# Altium PCB 千米手柄参数.PcbDoc
Units mil, origin at the board's own origin, x right, y up, seen from the top; angles counter-clockwise.
Board outline 1270.82 x 2484.15 mil, 2 copper layers (Top Layer, Bottom Layer); 28 components, 29 nets, 126 pads, 18 vias.
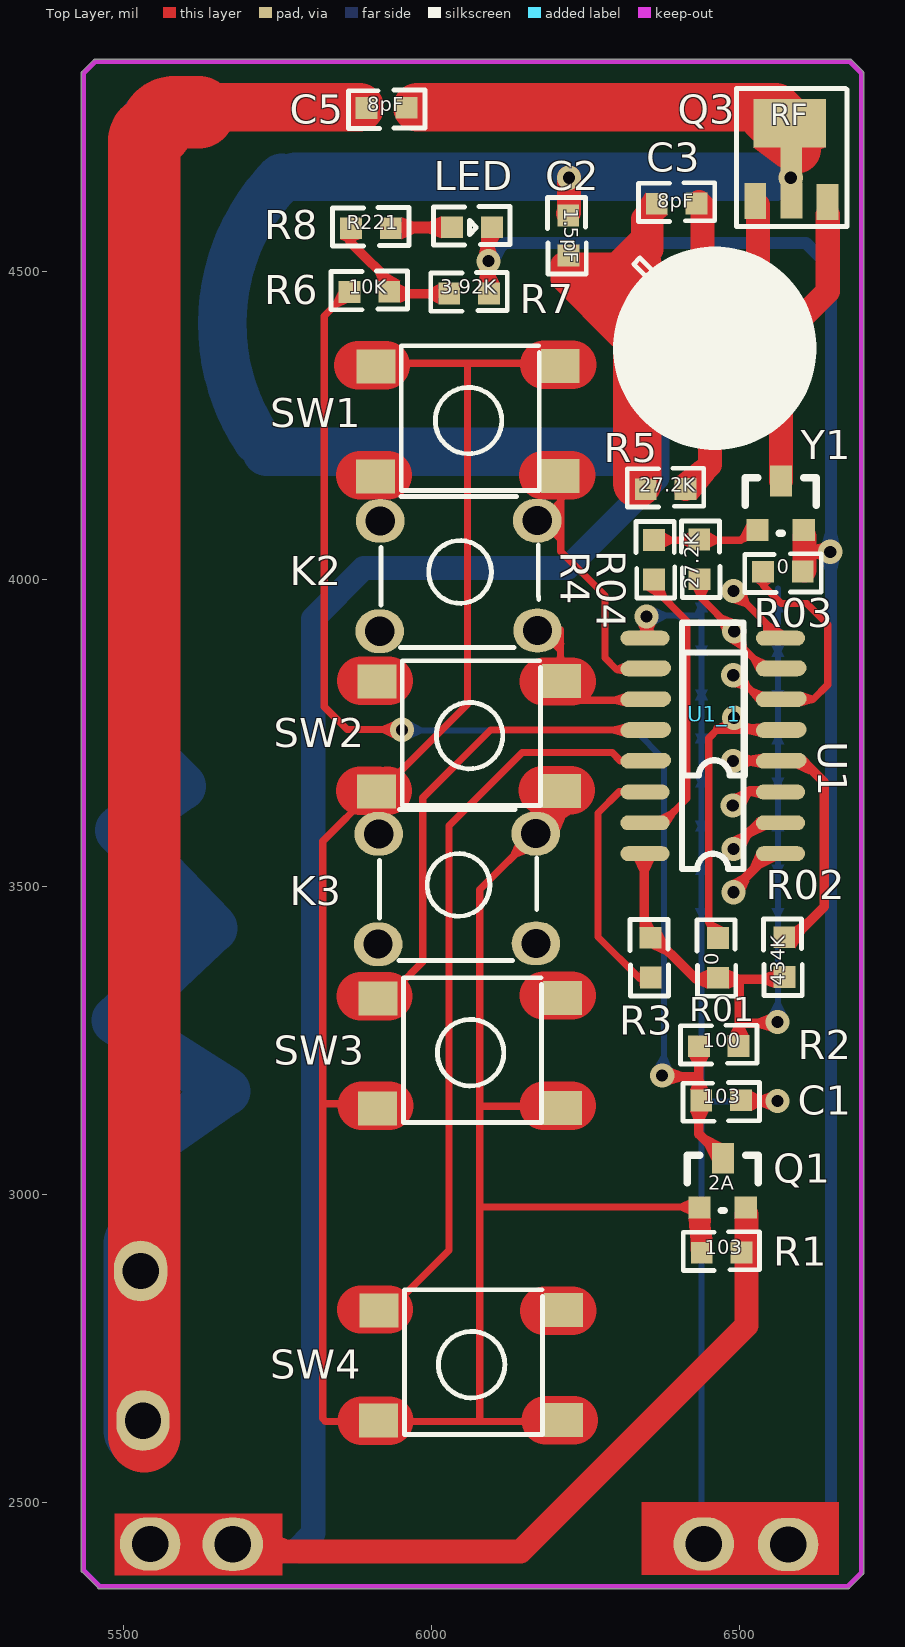
[diagram p0: Top Layer view]
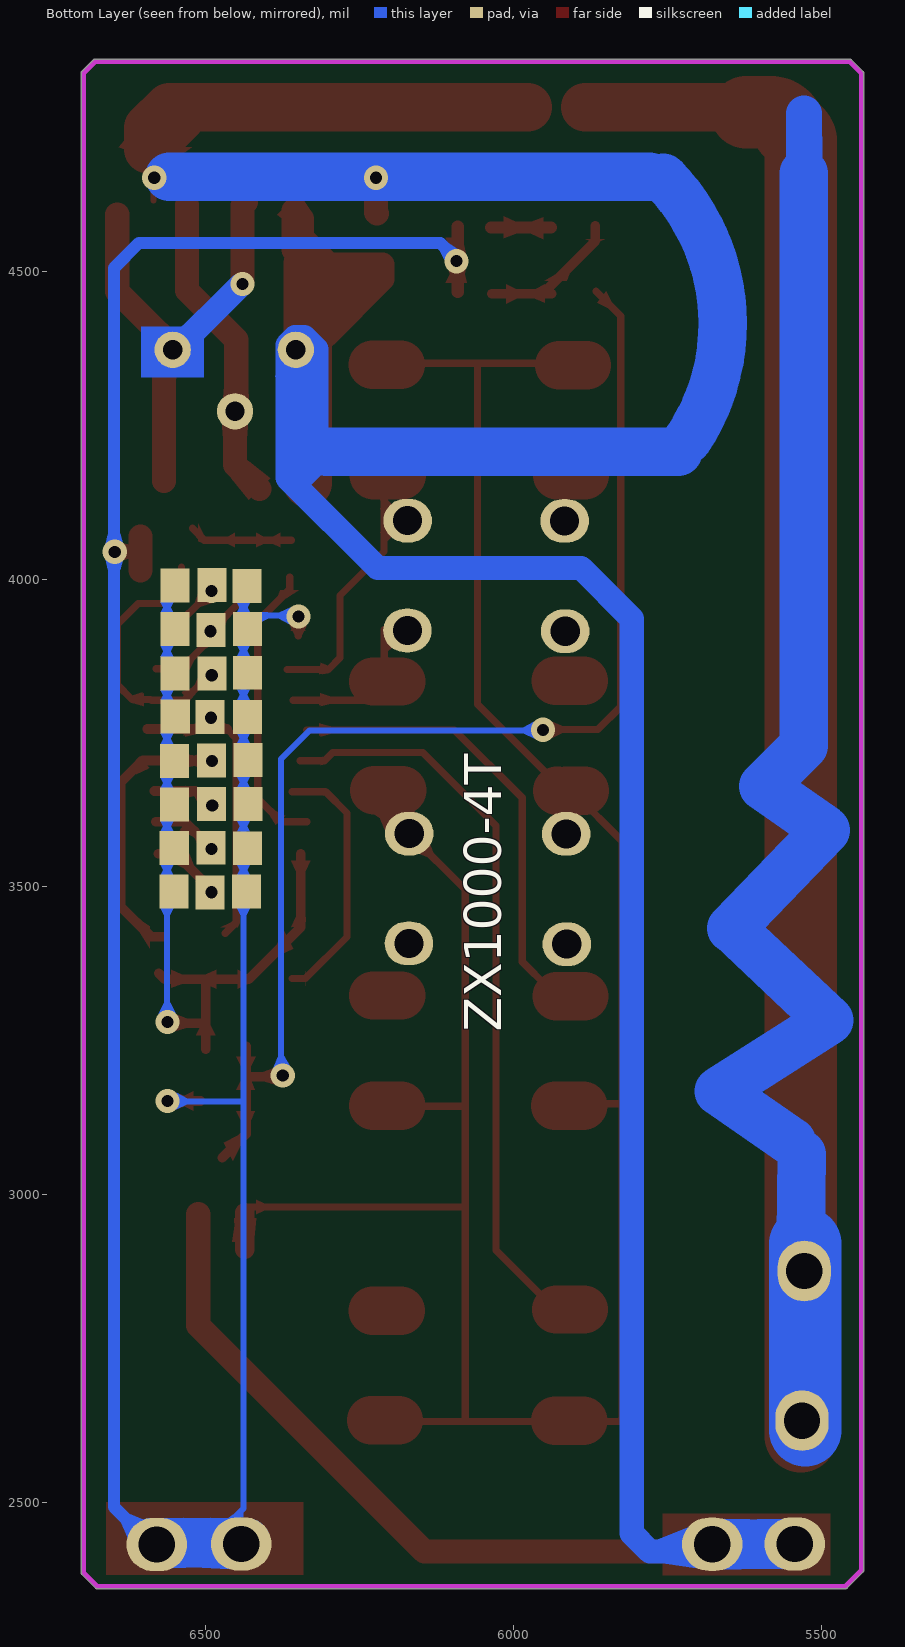
[diagram p1: Bottom Layer view, seen from below]

## Layer stack, top to bottom
Top Solder: solder mask 0.4, Solder Resist, Dk 3.5
Top Layer: signal copper 1.4
Dielectric 1: dielectric 12.6, FR-4, Dk 4.8
Bottom Layer: signal copper 1.4
Bottom Solder: solder mask 0.4, Solder Resist, Dk 3.5

## Board outline
5432.21,2387.21 5458.04,2361.37 ccw(c5460.83,2364.17) 5460.83,2360.22 6675.83,2360.22 ccw(c6675.83,2364.17) 6678.63,2361.37 6700.71,2383.46 ccw(c6697.92,2386.25) 6701.87,2386.25 6701.87,4815 ccw(c6697.92,4815) 6701.78,4815.83 ccw(c6697.92,4816.67) 6701.87,4816.67 6701.87,4822.08 ccw(c6697.92,4822.08) 6700.71,4824.88 6682.38,4843.21 ccw(c6679.58,4840.42) 6679.58,4844.37 5453.75,4844.37 ccw(c5453.75,4840.42) 5450.96,4843.21 5432.21,4824.46 ccw(c5435,4821.67) 5431.05,4821.67 5431.05,2390 ccw(c5435,2390)

## Design rules (kind name [scope] priority, off if disabled: settings)
Clearance [All] p1: gap=10 ignorepadtopadclearanceinfootprint=FALSE except(0: Arc-Hole Track-Hole SMDPad-Hole THPad-Hole Via-Hole Fill-Hole Poly-Hole Region-Hole Text-Hole)
PolygonConnect [All] p1: connectstyle=Relief reliefconductorwidth=10 reliefentries=4 polygonreliefangle="90 Angle" airgapwidth=10
RoutingVias [All] p1: holewidth=28 width=50 viastyle="Through Hole" minholewidth=28 minwidth=50 maxholewidth=28 maxwidth=50
SolderMaskExpansion [All] p1: expansion=4 istentingtop=FALSE
Width [All] p1: maxlimit=200 minlimit=10 preferedwidth=10 minimp=50.000000 maximp=50.000000 favimp=50.000000
30 further rules are at their usual default settings.

## Components (designator, comment, footprint, x,y, rotation, side; value= is the part's Value field where it differs from the comment)
C1 "" R06 6430,3158.33 r90 top
C2 "" R06 6227.08,4598.33 r0 top
C3 "" R06 6438.33,4605 r270 top
C5 "" R06 5886.67,4770.42 r90 top
K2 "" K1 5911.67,4085.83 r270 top
K3 "" K1 5909.17,3577.5 r270 top
LED "" R06 6105.83,4566.67 r270 top
Q1 "" SOT-23 6435.42,2979.58 r0 top
Q3 "" Q2 6587.92,4623.75 r270 top
R1 "" R06 6511.25,2901.25 r270 top
R01 "" R06 6470,3425 r0 top
R2 "" R06 6506.67,3236.67 r270 top
R02 "" R06 6577.92,3426.25 r0 top
R3 "" R06 6360.83,3425.42 r0 top
R03 "" R06 6530.42,4017.08 r90 top
R4 "" R06 6356.25,3991.25 r180 top
R04 "" R06 6430,3991.88 r180 top
R5 "" R06 6420.42,4141.25 r270 top
R6 "" R06 5939.17,4461.67 r270 top
R7 "" R06 6101.25,4459.17 r270 top
R8 "" R06 5941.67,4565 r270 top
SW1 "" sw1 6213.33,4335 r270 top
SW2 "" sw1 6215,3823.33 r270 top
SW3 "" sw1 6216.67,3308.33 r270 top
SW4 "" sw1 6218.33,2801.67 r270 top
U1 "" SO-16 6566.67,3554.17 r180 top
U1_1 "" SO-8 6569.17,3705.83 r180 top
Y1 "" SOT-23 6529.58,4079.58 r0 top

## Footprints (in the part's own frame and the unit in brackets; to place one, negate y for a bottom-side part, rotate by r counter-clockwise, add the part's x,y. Pads: shape width x height; smd on the part's side, far side on the other; paste and mask are expansions set on the pad)
K1 [mm]
  oval 1.8x2 hole 1.2: 21(4.329,0.106) 22(-0.222,0.127) 23(-0.233,6.604) 24(4.297,6.615)
  silkscreen extent -1.23,0.16 5,6.65
Q2 [mm]
  rect 1.5x0.9 smd: 34(0.286,1.408) 35(0.222,-0.085) 36(0.243,-1.577) 37(-1.281,-0.095)
  rect 2x3 smd: 39(-2.963,-0.159)
  silkscreen extent -4.4,-2.36 1.29,2.21
R06 [mm]
  rect 0.9x0.9 smd: 31(-0.127,-0.201) 32(-0.122,-1.841)
  silkscreen extent -0.98,-2.6 0.61,0.55
SO-8 [mil]
  oval 80x24 smd: 1(0,0) 2(0,-50) 3(0,-100) 4(0,-150) 5(220,-150) 6(220,-100) 7(220,-50) 8(220,0)
  silkscreen extent 60,-175 160,25
SO-16 [mil]
  oval 80x24 smd: 1(0,0) 2(0,-50) 3(0,-100) 4(0,-150) 5(0,-200) 6(0,-250) 7(0,-300) 8(0,-350) 9(220,-350) 10(220,-300) 11(220,-250) 12(220,-200) 13(220,-150) 14(220,-100) 15(220,-50) 16(220,0)
  silkscreen extent 60,-375 160,25
SOT-23 [mil]
  rect 36x36 smd: 1(0,0) 2(75,0)
  rect 36x50 smd: 3(38,80)
  silkscreen extent -20,-5 95,85
sw1 [mm]
  rect 1.4x1.6 smd: 26(-0.286,-0.106) 27(4.255,-0.106) 28(-0.265,-7.715) 29(4.276,-7.736)
  silkscreen extent -1.12,-6.67 4.85,-0.97

## Free pads (board coordinates)
  rect 47.24x55.12 smd far side: 1(6489.58,3990.42) 2(6432.5,3988.75) 3(6432.08,3919.17) 4(6490.83,3917.5) 5(6431.67,3847.92) 6(6489.58,3847.08) 7(6432.08,3776.25) 8(6492.5,3776.25) 9(6490.42,3705.42) 10(6431.25,3706.25) 11(6430.83,3634.58) 12(6490.42,3634.58) 13(6491.25,3563.75) 14(6431.67,3562.92) 15(6433.75,3492.5) 16(6492.92,3491.25) 17(6551.25,3492.5) 18(6550.83,3563.33) 19(6550.42,3633.75) 20(6550.42,3704.58) 21(6549.17,3776.67) 22(6549.58,3846.67) 23(6549.58,3918.75) 24(6549.58,3989.58)
  round 59.05 hole 31.5: 25(6353.33,4372.5) 26(6452.08,4272.5) 27(6553.33,4372.5)
  oval 86.61x98.42 hole 59.05: 28(5527.5,2876.25) 29(5531.25,2633.33)
  oval 98.42x86.61 hole 59.05: 30(6579.17,2432.08) 31(6442.08,2432.92) 32(5542.92,2432.92) 33(5677.08,2432.5)

## Via types
v1: diameter 39.37, hole 19.68, Top Layer to Bottom Layer, 18 vias

## Nets (pads, with @x,y where several pads share a name; then routed paths per layer and width w, separated by ;. In a path a pad name is that pad's centre, name@x,y a point inside that pad or via, vN(x,y) a via of type N, cw(c..) or ccw(c..) an arc to the next point about the centre after c; other vN are vias at no path point)
NewNet1: pad.26 Q3.36 R5.31 | length 510.8
  Top Layer w39.37: R5.31 6452.08,4185.83 pad.26 ; pad.26@6450,4272.5 6450,4388.75 6530,4468.75 Q3.36@6530,4607.5
NewNet2: C3.31 pad.27 Q3.34 Y1.3 | length 754.9
  Top Layer w39.37: C3.31@6434.17,4612.5 6440,4606.67 v1@6440,4484.17 ; Y1.3 6567.58,4358.25 pad.27 6553.33,4377.08 6643.33,4467.08 Q3.34@6643.33,4592.08
  Bottom Layer w39.37: v1@6444.17,4476.67 pad.27@6549.17,4371.67
  other v1: 6440,4479.17
NewNet3: C2.31 C2.32 C3.32 C5.32 pad.25 pad.32 pad.33 Q1.2 Q3.37 Q3.39 R1.31 R5.32 | length 7936.5
  Top Layer w39.37: pad.32@5513.33,2420.83 6144.58,2420.83 6511.67,2787.92 Q1.2@6511.67,2968.33 ; C2.31@6221.67,4593.75 6223.33,4595.42 v1(6223.33,4652.01) ; 6253.33,4488.75 6309.58,4488.75 ; 6255.83,4486.25 6306.67,4435.42 ; 6305,4395 6212.5,4487.5 6212.5,4510.83 6300,4510.83 6343.75,4554.58 6343.75,4585.42 6357.08,4598.75 6357.08,4535
  Top Layer w78.74: C5.32@5976.67,4766.67 6559.17,4766.67 6592.92,4732.92 6592.92,4697.92 Q3.39@6540.42,4750.42 ; R5.32@6334.17,4155.83 6334.17,4512.5
  Bottom Layer w39.37: pad.33@5696.67,2420.83 5778.33,2420.83 5807.92,2450.42 5807.92,3935.83 5890,4017.92 6220.42,4017.92 6367.08,4164.58 6367.08,4380.42 6354.58,4392.92 6339.58,4392.92 6320,4373.33 6320,4190.42 ; 6316.67,4192.08 6339.58,4169.17 ; 6342.92,4182.08 pad.25@6342.92,4374.17
  Bottom Layer w78.74: pad.32@5535.83,2432.5 pad.33 pad.33@5680,2432.5 ; 5717.25,4226.22 cw(c6000.06,4414.95) 5756.33,4652.01 ; 5732.5,4206.67 6304.17,4206.67 ; 5778.33,4653.33 6559.17,4653.33
  other v1: 6583.33,4652.01
NewNet4: R4.32 R04.32 Y1.1 | length 168.8
  Top Layer w11.81: R4.32@6360.42,4063.33 6502.08,4063.33 Y1.1@6521.25,4082.5
NewNet5: C1.32 LED.31 pad.2 pad.3 pad.5 pad.7 pad.10 pad.11 pad.14 pad.15 pad.30 pad.31 R03.32 R7.31 U1.9 Y1.2 | length 4885.6
  Top Layer w11.81: U1.9@6349.58,3907.5 v1@6349.58,3940.42
  Top Layer w15.75: C1.32@6508.33,3152.29 v1(6561.67,3152.29)
  Top Layer w19.68: R7.31@6090.42,4466.25 6090.42,4516.46 LED.31@6090.42,4572.92 ; 6608.33,4045 v1@6649.17,4045
  Top Layer w39.37: R03.32@6605.83,4014.58 Y1.2@6605.83,4069.17
  Bottom Layer w10: v1@6338.33,3940.83 pad.3@6431.67,3940.83 ; pad.2@6438.33,3991.67 6438.33,3919.17 6438.33,3776.25 6438.33,3151.46 ; pad.31@6467.5,2461.67 6438.33,2490.83 6438.33,3151.46 ; v1@6570,3151.46 6438.33,3151.46
  Bottom Layer w11.81: v1@6644.58,4043.75 v1@6648.75,4047.92
  Bottom Layer w19.68: v1@6090.83,4517.92 6118.75,4545.83 6608.33,4545.83 6648.75,4505.42 v1@6648.75,4047.92 ; pad.30@6595,2439.17 6648.75,2492.92 v1@6648.75,4043.33
  Bottom Layer w78.74: pad.31@6434.17,2435.83 6579.17,2435.83 pad.30@6588.33,2435.83
  other v1: 6348.96,3939.17 6647.5,4044.38 6092.5,4516.46
NewNet6: pad.6 R03.31 U1.6 U1_1.3 | length 446.3
  Top Layer w11.81: v1@6483.75,3854.58 6535,3803.33 U1.6@6587.5,3803.33 ; R03.31@6539.17,4019.17 6539.17,3989.17 6567.92,3960.42 6609.17,3960.42 6643.33,3926.25 6643.33,3828.33 6619.58,3804.58 U1.6@6590,3804.58
  other v1: 6490,3843.96
NewNet7: pad.4 R04.31 U1.7 U1_1.4 | length 217.9
  Top Layer w11.81: R04.31@6437.5,3999.58 6437.5,3969.58 v1@6488.33,3918.75 ; v1@6486.25,3908.33 6540,3854.58 U1.7@6580,3854.58
  other v1: 6491.67,3915.42
NewNet8: R4.31 U1.15 | length 475.9
  Top Layer w11.81: U1.15@6335.83,3605.83 6377.08,3605.83 6415,3643.75 6415,3931.67 6363.33,3983.33 R4.31@6363.33,4003.33
NewNet9: pad.17 pad.18 pad.19 pad.20 pad.21 pad.22 pad.23 pad.24 R01.32 R2.31 R02.32 R3.31 U1.16 | length 1269.2
  Top Layer w15.75: U1.16@6345.42,3553.75 6345.42,3434.58 6430,3350 6499.58,3350 ; R2.31@6499.58,3236.25 6499.58,3350 ; 6501.25,3278.54 v1@6560,3278.54 ; R02.32@6576.25,3360 6566.25,3350 6499.58,3350
  Bottom Layer w10: v1@6562.5,3277.5 6562.5,3492.5 6562.5,3704.58 6562.5,3846.67 pad.24@6562.5,3985
  other v1: 6561.67,3280.62
NewNet10: R3.32 U1.14 | length 421.5
  Top Layer w11.81: U1.14@6359.17,3654.58 6305,3654.58 6270.42,3620 6270.42,3418.75 6337.92,3351.25 R3.32@6359.58,3351.25
NewNet11: SW4.28 U1.13 U1_1.8 | length 1242.7
  Top Layer w11.81: SW4.28@5932.5,2814.17 6028.33,2910 6028.33,3599.58 6147.08,3718.33 6293.33,3718.33 6306.67,3705 U1.13@6346.25,3705
  Top Layer w78.74: SW4.28@5885.42,2813.75 SW4.28@5930.42,2813.75
NewNet12: SW3.28 U1.12 U1_1.7 | length 765.9
  Top Layer w11.81: SW3.28@5943.75,3336.67 5985.83,3378.75 5985.83,3645 6095.83,3755 U1.12@6335.42,3755
  Top Layer w78.74: SW3.28@5885,3322.92 SW3.28@5930,3322.92
NewNet13: K2.24 SW2.26 U1.11 U1_1.6 | length 274.2
  Top Layer w11.81: K2.24@6169.17,3918.33 6209.58,3918.33 SW2.26@6209.58,3852.08 ; 6235.42,3803.33 U1.11@6357.92,3803.33
  Top Layer w78.74: SW2.26@6182.5,3833.75 SW2.26@6227.5,3833.75
NewNet14: K2.23 SW1.27 U1.10 U1_1.5 | length 489.1
  Top Layer w11.81: K2.23@6172.92,4093.33 K2.23@6208.33,4093.33 ; SW1.27@6210,4157.92 6210,4045 6281.67,3973.33 6281.67,3872.08 6300.42,3853.33 U1.10@6367.08,3853.33
  Top Layer w78.74: SW1.27@6181.67,4168.75 SW1.27@6226.67,4168.75
NewNet15: pad.1 U1.8 | length 104.8
  Top Layer w11.81: v1@6491.67,3980 6559.58,3912.08 U1.8@6559.58,3903.33
  other v1: 6490.42,3980.83
NewNet16: pad.8 R01.31 U1.5 U1_1.2 | length 487.6
  Top Layer w11.81: 6465,3756.67 6450,3741.67 6450,3442.92 R01.31@6467.92,3425 ; v1@6492.29,3760 v1@6492.29,3772.71
  Top Layer w15.75: 6465,3756.67 U1.5@6594.58,3756.67
  other v1: 6491.04,3774.79
NewNet17: pad.9 R02.31 U1.4 U1_1.1 | length 455.2
  Top Layer w15.75: v1@6489.58,3705.42 6602.08,3705.42 6637.92,3669.58 6637.92,3468.33 6588.75,3419.17 R02.31@6567.5,3419.17
  other v1: 6489.79,3704.58
NewNet18: pad.12 U1.3 | length 101.6
  Top Layer w15.75: v1@6491.67,3630.83 6516.67,3655.83 U1.3@6582.92,3655.83
  other v1: 6489.17,3632.29
NewNet19: pad.13 U1.2 | length 110.1
  Top Layer w15.75: v1@6488.75,3561.25 6533.33,3605.83 U1.2@6580.42,3605.83
  other v1: 6490.21,3561.88
NewNet20: pad.16 U1.1 | length 117.1
  Top Layer w15.75: v1@6485.83,3490.83 6549.17,3554.17 U1.1@6576.67,3554.17
  other v1: 6490.21,3491.46
NewNet21: C1.31 Q1.3 R2.32 R6.32 | length 2040.2
  Top Layer w11.81: R6.32@5865.83,4467.5 5825.83,4427.5 5825.83,3792.92 5862.92,3755.83 v1@5952.5,3755.83
  Top Layer w15.75: v1@6371.25,3191.67 6428.75,3191.67 ; R2.32@6434.17,3241.25 6434.17,3098.75 Q1.3@6472.92,3060
  Bottom Layer w10: v1@5953.75,3754.17 6330.83,3754.17 6377.5,3707.5 v1@6377.5,3198.33
  other v1: 6374.58,3193.75 5952.08,3755.21
NewNet22: K3.22 K3.23 Q1.1 R1.32 SW1.26 SW1.28 SW2.27 SW2.29 SW3.27 SW3.29 SW4.27 SW4.29 | length 4611.6
  Top Layer w11.81: 5823.75,3147.92 SW3.29@5922.92,3147.92 ; 5883.33,3625.83 SW2.29@5911.67,3654.17 ; SW2.29@5901.67,3652.5 5823.33,3574.17 5823.33,2637.08 5823.75,2636.67 5823.75,2636.25 5828.33,2631.67 5907.5,2631.67 SW4.29@5914.17,2625 ; SW1.28@5909.17,4345 SW1.28 5911.25,4347.08 5914.58,4350.42 6058.33,4350.42 ; K3.22@5911.67,3585.83 SW2.29@5911.67,3654.17 ; SW2.29@5911.67,3660.83 5911.67,3656.25 SW2.29@5911.67,3654.17 ; SW4.29@5942.5,2631.67 6165,2631.67 ; 6078.33,2634.58 6078.33,2980.42 ; 6166.25,3143.75 6078.33,3143.75 ; K3.23 6078.33,3495.83 6078.33,3143.75 ; SW1.26@6205,4350.42 6058.33,4350.42 ; Q1.1@6432.92,2980.42 6078.33,2980.42 ; SW2.29@5911.67,3654.17 5913.75,3656.25 5917.92,3656.25 6058.33,3796.67 6058.33,4350.42 ; 6078.33,2980.42 6078.33,3143.75
  Top Layer w19.68: K3.23@6159.79,3596.04 SW2.27@6216.67,3652.92 ; K3.23@6179.17,3590.42 SW2.27@6218.33,3629.58
  Top Layer w31.5: R1.32@6436.25,2911.25 Q1.1@6436.25,2970.83
  Top Layer w78.74: SW1.28@5880.83,4347.08 5911.25,4347.08 SW1.28@5925.83,4347.08 ; SW2.29@5884.17,3656.25 5911.67,3656.25 SW2.29@5913.75,3656.25 ; SW4.29@5886.67,2632.92 SW4.29@5931.67,2632.92 ; SW3.29@5886.67,3144.58 SW3.29@5931.67,3144.58 ; SW2.29@5927.92,3656.25 SW2.29@5929.17,3656.25 ; SW2.27@6180.83,3657.08 SW2.27@6225.83,3657.08 ; SW3.27@6182.5,3144.58 SW3.27@6227.5,3144.58 ; SW1.26@6183.33,4347.92 SW1.26@6228.33,4347.92 ; SW4.27@6185.83,2633.75 SW4.27@6230.83,2633.75
NewNet23: SW4.26 | length 45
  Top Layer w78.74: SW4.26@6183.33,2812.08 SW4.26@6228.33,2812.08
NewNet24: SW3.26 | length 45
  Top Layer w78.74: SW3.26@6182.5,3323.75 SW3.26@6227.5,3323.75
NewNet25: SW2.28 | length 45
  Top Layer w78.74: SW2.28@5885.83,3834.58 SW2.28@5930.83,3834.58
NewNet26: K2.22 SW1.29 | length 45
  Top Layer w78.74: SW1.29@5884.17,4168.75 SW1.29@5929.17,4168.75
NewNet27: R6.31 R7.32 R8.32 | length 228.6
  Top Layer w15.75: R8.32@5867.08,4574.17 5867.08,4548.75 R6.31@5942.08,4473.75 ; R6.31@5937.92,4463.33 R7.32@6035,4463.33
NewNet28: LED.32 R8.31 | length 97.1
  Top Layer w19.68: R8.31@5939.17,4570.83 LED.32@6036.25,4570.83
NewNet29: C5.31 pad.28 pad.29 | length 4921.7
  Top Layer w78.74: 5633.33,4766.67 C5.31@5883.33,4766.67
  Top Layer w118.11: pad.29@5533.33,2608.33 5533.33,4710.83 ; 5533.5,4710.83 cw(c5552.5,4710.83) 5552.5,4729.83 ; 5552.83,4730 cw(c5580.83,4730) 5580.83,4758 ; 5580.83,4758.33 5621.67,4758.33
  Bottom Layer w59.05: 5527.5,4682.08 5527.92,4756.25
  Bottom Layer w78.74: 5528.75,4659.58 5528.75,3729.17 5594.17,3663.75 5492.5,3592.5 5645.83,3433.33 5486.67,3283.33 5666.67,3168.33 5547.5,3085.83 ; 5531.67,3065.83 5533.33,2933.33
  Bottom Layer w118.11: pad.29@5525.83,2617.5 pad.28@5525.83,2920
pads on no net: K2.21 K3.21 K3.24 Q3.35
copper on no net: | length 14.6
  Top Layer w10: 6584.58,4615 6584.58,4629.64

## Keep-outs
Keep-Out Layer:
  lines w7.87: 6697.92,4815 6697.92,2400.42 6697.92,2386.25 6675.83,2364.17 5460.83,2364.17 5435,2390 5435,4821.67 5453.75,4840.42 6679.58,4840.42 6697.92,4822.08 6697.92,4816.67

## Other copper
Top Layer:
  region net NewNet3: 5485,2482.5 5485,2381.67 5757.5,2381.67 5757.5,2482.5
  region net NewNet5: 6340.83,2500.83 6340.83,2382.5 6661.67,2382.5 6661.67,2500.83
Bottom Layer:
  region net NewNet2: 6502.5,4410 6502.5,4327.5 6605,4327.5 6605,4410

## Silkscreen, mask and mechanical layers (free items; w line width, h text height)
Top Overlay:
  circle w236.22: c6460,4375 r47
  lines w7.87: 6072.08,4570 6061.67,4559.58 6061.67,4582.5 6072.08,4572.08 ; 6174.17,3966.67 6174.17,3971.67 ; 6358.33,4481.67 6328.33,4511.67 6338.33,4521.67 6368.33,4491.67 6368.33,4481.67
  text "8pF" at 5895.7,4752.1 h40
  text "RF" at 6550.06,4725 h60
  text "1.5pF" at 6207.1,4602.6 h40 r270
  text "8pF" at 6366.93,4595.12 h40
  text "R221" at 5861.93,4560 h40
  text "10K" at 5865.84,4455.44 h40
  text "3.92K" at 6014.03,4455.44 h40
  text "27.2K" at 6337.5,4134.17 h40
  text "0" at 6560.81,4000.44 h40
  text "27.2K" at 6442.08,3983.75 h40 r90
  text "0" at 6474.97,3372.47 h40 r90
  text "434K" at 6582.06,3339.28 h40 r90
  text "100" at 6440.85,3231.28 h40
  text "103" at 6440.81,3140.44 h40
  text "2A" at 6448.99,3000 h40
  text "103" at 6443.31,2895.44 h40
Bottom Overlay:
  text "ZX1000-4T" at 6020,3265 h60 r270
Top Solder:
  lines w78.74: 5543.33,2432.08 5677.5,2432.08 ; 6464.58,2439.17 6572.92,2439.17
Bottom Solder:
  lines w78.74: 5537.5,2432.5 5684.17,2432.5 ; 6441.67,2435 6585,2435